# Altium PCB PCB3.PcbDoc
Units mm, origin at the board's own origin, x right, y up, seen from the top; angles counter-clockwise.
Board outline 35.94 x 35.31 mm, 2 copper layers (Top Layer, Bottom Layer); 16 components, 15 nets, 51 pads, 4 vias.
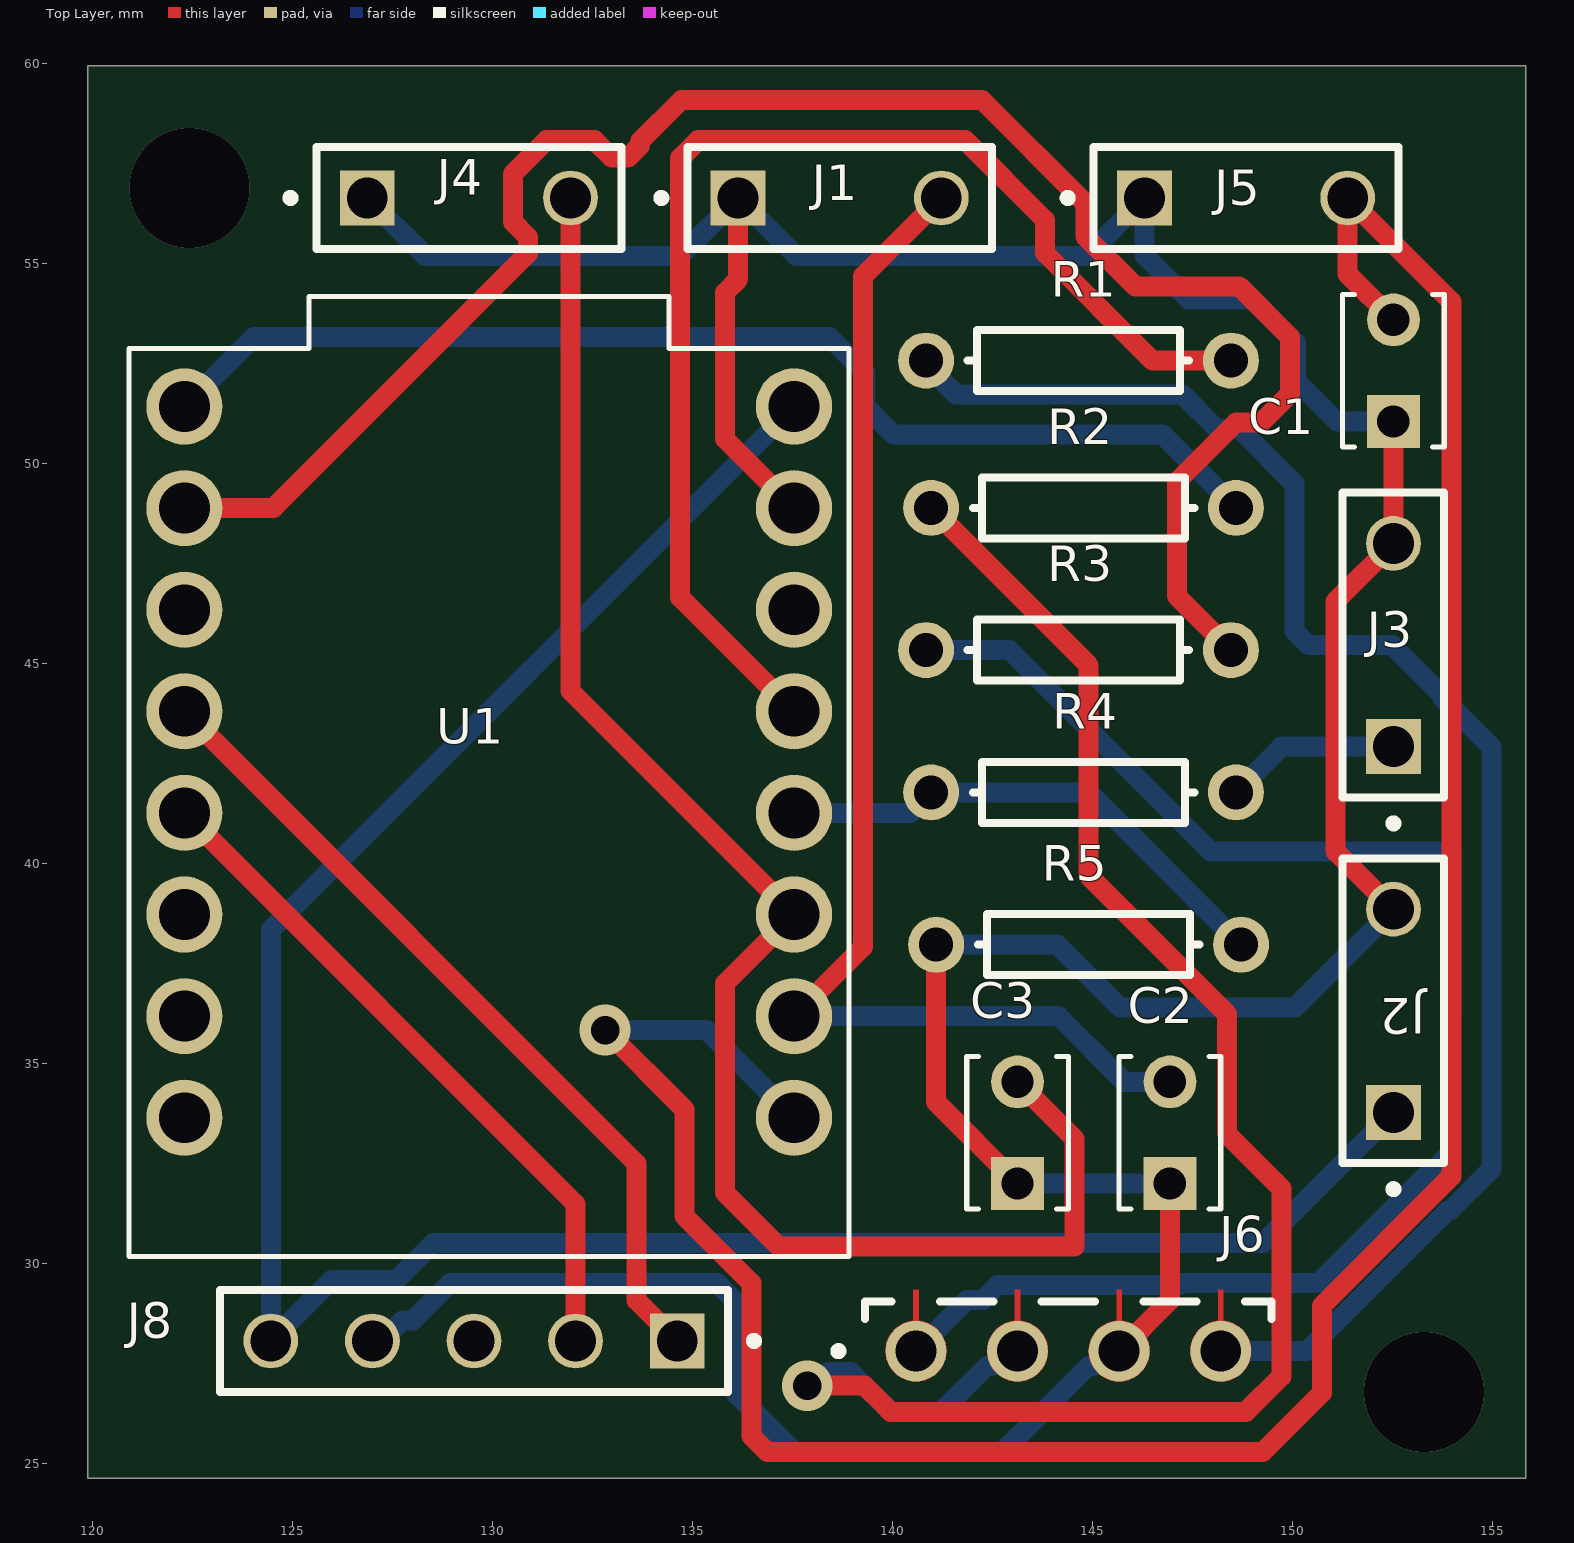
[diagram p0: Top Layer view]
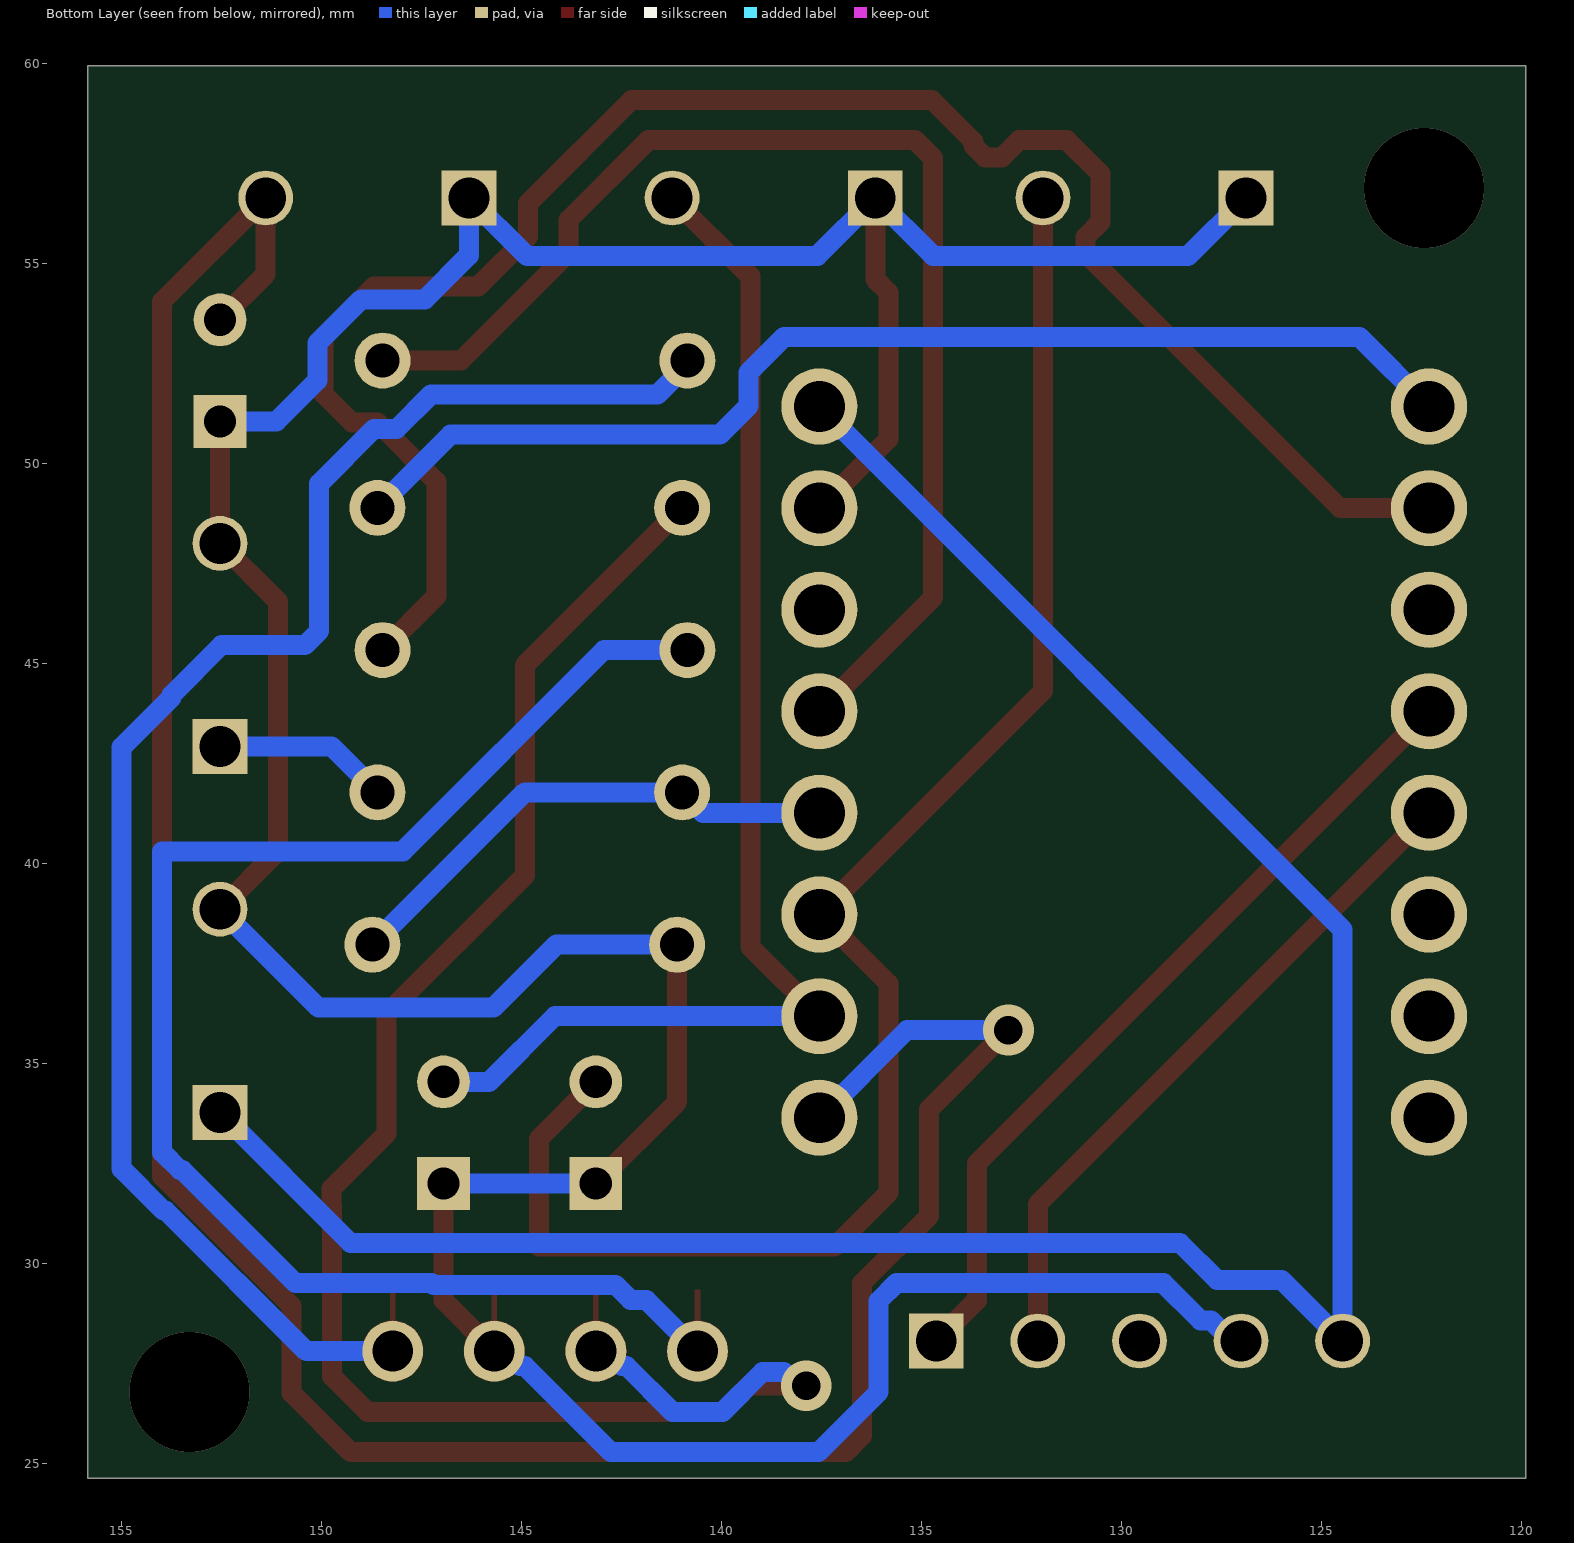
[diagram p1: Bottom Layer view, seen from below]

## Layer stack, top to bottom
Top Solder: solder mask 0.0102, Solder Resist, Dk 3.5
Top Layer: signal copper 0.0356
Dielectric 1: dielectric 0.32, FR-4, Dk 4.8
Bottom Layer: signal copper 0.0356
Bottom Solder: solder mask 0.0102, Solder Resist, Dk 3.5

## Board outline
119.888,24.638 155.829,24.638 155.829,59.944 119.888,59.944

## Design rules (kind name [scope] priority, off if disabled: settings)
Clearance [All] p1: gap=0.508 ignorepadtopadclearanceinfootprint=FALSE except(0.635: Arc-Hole Track-Hole SMDPad-Hole THPad-Hole Via-Hole Fill-Hole Poly-Hole Region-Hole Text-Hole)
PolygonConnect [All] p1: connectstyle=Relief reliefconductorwidth=0.254 reliefentries=4 polygonreliefangle="90 Angle" airgapwidth=0.254
RoutingVias [All] p1: holewidth=0.711 width=1.27 viastyle="Through Hole" minholewidth=0.711 minwidth=1.27 maxholewidth=0.711 maxwidth=1.27
SolderMaskExpansion [All] p1: expansion=0.102 istentingtop=FALSE
Width [All] p1: maxlimit=0.7 minlimit=0.3 preferedwidth=0.5
30 further rules are at their usual default settings.

## Components (designator, comment, footprint, x,y, rotation, side; value= is the part's Value field where it differs from the comment)
C1 "C315C470J1G5TA" CAPRR254W54L381T254H466 152.527,52.324 r90 top
C2 "C315C470J1G5TA" CAPRR254W54L381T254H466 146.939,33.274 r90 top
C3 "C315C470J1G5TA" CAPRR254W54L381T254H466 143.129,33.274 r90 top
J1 "S2" ? 136.144,56.642 r0 top
J2 "S4" ? 152.527,33.782 r90 top
J3 "S1" ? 152.527,42.926 r90 top
J4 "S3" ? 126.873,56.642 r0 top
J5 "S1" ? 146.304,56.642 r0 top
J6 "RGB" SAMTEC_MTLW-104-X-X-S-X 144.399,27.813 r180 top
J8 "RTC" SAMTEC_TSW-105-23-L-S 134.62,28.067 r180 top
R1 "Res1" AXIAL-0.3 144.653,52.578 r180 top value=1K
R2 "Res1" AXIAL-0.3 144.78,48.895 r180 top value=1K
R3 "Res1" AXIAL-0.3 144.653,45.339 r180 top value=1K
R4 "Res1" AXIAL-0.3 144.78,41.783 r180 top value=1K
R5 "Res1" AXIAL-0.3 144.907,37.973 r180 top value=1K
U1 "ESP32-C3_SUPERMINI" MODULE_ESP32-C3_SUPERMINI 129.921,41.529 r0 top

## Footprints (in the part's own frame and the unit in brackets; to place one, negate y for a bottom-side part, rotate by r counter-clockwise, add the part's x,y. Pads: shape width x height; smd on the part's side, far side on the other; paste and mask are expansions set on the pad)
AXIAL-0.3 [mm] "Axial Device, Thru-Hole; 2 Leads; 0.3 in Pin Spacing"
  round 1.4 hole 0.85: 1(-3.81,0) 2(3.81,0)
  silkscreen extent -2.77,-0.76 2.77,0.76
CAPRR254W54L381T254H466 [mm]
  rect 1.318x1.318 / inner round 1.318 / far side rect 1.318x1.318 hole 0.81: 1(-1.27,0)
  round 1.318 hole 0.81: 2(1.27,0)
  silkscreen extent -1.91,-1.27 1.91,1.27
MODULE_ESP32-C3_SUPERMINI [mm]
  round 1.905 hole 1.27: 0(7.62,-7.88) 1(7.62,-5.34) 2(7.62,-2.8) 3(7.62,-0.26) 3.3(7.62,4.82) 4(7.62,2.28) 5(-7.62,9.9) 5V(7.62,9.9) 6(-7.62,7.36) 7(-7.62,4.82) 8(-7.62,2.28) 9(-7.62,-0.26) 10(-7.62,-2.8) 20(-7.62,-5.34) 21(-7.62,-7.88) G(7.62,7.36)
  silkscreen extent -9,-11.35 9,12.65
SAMTEC_MTLW-104-X-X-S-X [mm]
  round 1.52 hole 1.02: 01(3.81,0) 02(1.27,0) 03(-1.27,0) 04(-3.81,0)
  Top Layer region: -3.731,0.756 -3.652,0.743 -3.575,0.723 -3.501,0.694 -3.43,0.658 -3.363,0.615 -3.301,0.565 -3.245,0.509 -3.195,0.447 -3.152,0.38 -3.116,0.309 -3.087,0.235 -3.067,0.158 -3.054,0.079 -3.05,0 -3.051,-0.038 -3.054,-0.076 -3.058,-0.113 -3.065,-0.151 -3.073,-0.187 -3.083,-0.224 -3.095,-0.259 -3.109,-0.294 -3.124,-0.329 -3.141,-0.363 -3.16,-0.395 -3.18,-0.427 -3.202,-0.458 -3.225,-0.487 -3.25,-0.516 -3.276,-0.543 -3.304,-0.569 -3.333,-0.593 -3.362,-0.616 -3.393,-0.638 -3.425,-0.658 -3.458,-0.676 -3.492,-0.692 -3.527,-0.707 -3.562,-0.721 -3.598,-0.732 -3.634,-0.742 -3.671,-0.75 -3.708,-0.756 -3.745,-0.76 -3.745,-1.53 -3.875,-1.53 -3.875,-0.76 -3.912,-0.756 -3.949,-0.75 -3.986,-0.742 -4.022,-0.732 -4.058,-0.721 -4.093,-0.707 -4.128,-0.692 -4.162,-0.676 -4.195,-0.658 -4.227,-0.638 -4.258,-0.616 -4.287,-0.593 -4.316,-0.569 -4.344,-0.543 -4.37,-0.516 -4.395,-0.487 -4.418,-0.458 -4.44,-0.427 -4.46,-0.395 -4.479,-0.363 -4.496,-0.329 -4.511,-0.294 -4.525,-0.259 -4.537,-0.224 -4.547,-0.187 -4.555,-0.151 -4.562,-0.113 -4.566,-0.076 -4.569,-0.038 -4.57,0 -4.566,0.079 -4.553,0.158 -4.533,0.235 -4.504,0.309 -4.468,0.38 -4.425,0.447 -4.375,0.509 -4.319,0.565 -4.257,0.615 -4.19,0.658 -4.119,0.694 -4.045,0.723 -3.968,0.743 -3.889,0.756 -3.81,0.76
  Top Layer region: -1.191,0.756 -1.112,0.743 -1.035,0.723 -0.961,0.694 -0.89,0.658 -0.823,0.615 -0.761,0.565 -0.705,0.509 -0.655,0.447 -0.612,0.38 -0.576,0.309 -0.547,0.235 -0.527,0.158 -0.514,0.079 -0.51,0 -0.511,-0.038 -0.514,-0.076 -0.518,-0.113 -0.525,-0.151 -0.533,-0.187 -0.543,-0.224 -0.555,-0.259 -0.569,-0.294 -0.584,-0.329 -0.601,-0.363 -0.62,-0.395 -0.64,-0.427 -0.662,-0.458 -0.685,-0.487 -0.71,-0.516 -0.736,-0.543 -0.764,-0.569 -0.793,-0.593 -0.822,-0.616 -0.853,-0.638 -0.885,-0.658 -0.918,-0.676 -0.952,-0.692 -0.987,-0.707 -1.022,-0.721 -1.058,-0.732 -1.094,-0.742 -1.131,-0.75 -1.168,-0.756 -1.205,-0.76 -1.205,-1.53 -1.335,-1.53 -1.335,-0.76 -1.372,-0.756 -1.409,-0.75 -1.446,-0.742 -1.482,-0.732 -1.518,-0.721 -1.553,-0.707 -1.588,-0.692 -1.622,-0.676 -1.655,-0.658 -1.687,-0.638 -1.718,-0.616 -1.747,-0.593 -1.776,-0.569 -1.804,-0.543 -1.83,-0.516 -1.855,-0.487 -1.878,-0.458 -1.9,-0.427 -1.92,-0.395 -1.939,-0.363 -1.956,-0.329 -1.971,-0.294 -1.985,-0.259 -1.997,-0.224 -2.007,-0.187 -2.015,-0.151 -2.022,-0.113 -2.026,-0.076 -2.029,-0.038 -2.03,0 -2.026,0.079 -2.013,0.158 -1.993,0.235 -1.964,0.309 -1.928,0.38 -1.885,0.447 -1.835,0.509 -1.779,0.565 -1.717,0.615 -1.65,0.658 -1.579,0.694 -1.505,0.723 -1.428,0.743 -1.349,0.756 -1.27,0.76
  Top Layer region: 1.349,0.756 1.428,0.743 1.505,0.723 1.579,0.694 1.65,0.658 1.717,0.615 1.779,0.565 1.835,0.509 1.885,0.447 1.928,0.38 1.964,0.309 1.993,0.235 2.013,0.158 2.026,0.079 2.03,0 2.029,-0.038 2.026,-0.076 2.022,-0.113 2.015,-0.151 2.007,-0.187 1.997,-0.224 1.985,-0.259 1.971,-0.294 1.956,-0.329 1.939,-0.363 1.92,-0.395 1.9,-0.427 1.878,-0.458 1.855,-0.487 1.83,-0.516 1.804,-0.543 1.776,-0.569 1.747,-0.593 1.718,-0.616 1.687,-0.638 1.655,-0.658 1.622,-0.676 1.588,-0.692 1.553,-0.707 1.518,-0.721 1.482,-0.732 1.446,-0.742 1.409,-0.75 1.372,-0.756 1.335,-0.76 1.335,-1.53 1.205,-1.53 1.205,-0.76 1.168,-0.756 1.131,-0.75 1.094,-0.742 1.058,-0.732 1.022,-0.721 0.987,-0.707 0.952,-0.692 0.918,-0.676 0.885,-0.658 0.853,-0.638 0.822,-0.616 0.793,-0.593 0.764,-0.569 0.736,-0.543 0.71,-0.516 0.685,-0.487 0.662,-0.458 0.64,-0.427 0.62,-0.395 0.601,-0.363 0.584,-0.329 0.569,-0.294 0.555,-0.259 0.543,-0.224 0.533,-0.187 0.525,-0.151 0.518,-0.113 0.514,-0.076 0.511,-0.038 0.51,0 0.514,0.079 0.527,0.158 0.547,0.235 0.576,0.309 0.612,0.38 0.655,0.447 0.705,0.509 0.761,0.565 0.823,0.615 0.89,0.658 0.961,0.694 1.035,0.723 1.112,0.743 1.191,0.756 1.27,0.76
  Top Layer region: 3.889,0.756 3.968,0.743 4.045,0.723 4.119,0.694 4.19,0.658 4.257,0.615 4.319,0.565 4.375,0.509 4.425,0.447 4.468,0.38 4.504,0.309 4.533,0.235 4.553,0.158 4.566,0.079 4.57,0 4.569,-0.038 4.566,-0.076 4.562,-0.113 4.555,-0.151 4.547,-0.187 4.537,-0.224 4.525,-0.259 4.511,-0.294 4.496,-0.329 4.479,-0.363 4.46,-0.395 4.44,-0.427 4.418,-0.458 4.395,-0.487 4.37,-0.516 4.344,-0.543 4.316,-0.569 4.287,-0.593 4.258,-0.616 4.227,-0.638 4.195,-0.658 4.162,-0.676 4.128,-0.692 4.093,-0.707 4.058,-0.721 4.022,-0.732 3.986,-0.742 3.949,-0.75 3.912,-0.756 3.875,-0.76 3.875,-1.53 3.745,-1.53 3.745,-0.76 3.708,-0.756 3.671,-0.75 3.634,-0.742 3.598,-0.732 3.562,-0.721 3.527,-0.707 3.492,-0.692 3.458,-0.676 3.425,-0.658 3.393,-0.638 3.362,-0.616 3.333,-0.593 3.304,-0.569 3.276,-0.543 3.25,-0.516 3.225,-0.487 3.202,-0.458 3.18,-0.427 3.16,-0.395 3.141,-0.363 3.124,-0.329 3.109,-0.294 3.095,-0.259 3.083,-0.224 3.073,-0.187 3.065,-0.151 3.058,-0.113 3.054,-0.076 3.051,-0.038 3.05,0 3.054,0.079 3.067,0.158 3.087,0.235 3.116,0.309 3.152,0.38 3.195,0.447 3.245,0.509 3.301,0.565 3.363,0.615 3.43,0.658 3.501,0.694 3.575,0.723 3.652,0.743 3.731,0.756 3.81,0.76
  silkscreen extent -5.08,-1.25 5.85,0.1
SAMTEC_TSW-105-23-L-S [mm]
  rect 1.37x1.37 hole 1.02: 01(0,0)
  round 1.37 hole 1.02: 02(2.54,0) 03(5.08,0) 04(7.62,0) 05(10.16,0)
  silkscreen extent -2.02,-1.27 11.43,1.27
? [mm]
  rect 1.37x1.37 hole 1.02: 01(0,0)
  round 1.37 hole 1.02: 02(5.08,0)
  silkscreen extent -2.02,-1.27 6.35,1.27

## Part data
C1 C2 C3: "Capacitor: ceramic; MLCC, monolithic; 47pF; 100V; C0G; Â±5%; THT", Package="Radial Kemet", Check_prices=https://www.snapeda.com/parts/C315C470J1G5TA/KEMET/view-part/?ref=eda, MF=KEMET, MP=C315C470J1G5TA, SnapEDA_Link=https://www.snapeda.com/parts/C315C470J1G5TA/KEMET/view-part/?ref=snap
J1 J2 J3 J4 J5: library part TSW-202-07-T-S, Package=None, Availability=Unavailable, MP=TSW-202-07-T-S, Price=None
J6: library part MTLW-104-X-X-S-X, Package=None, Availability=Unavailable, MF="{'manufacturer': u'Samtec Inc.'}", MP=MTLW-104-X-X-S-X, Price=None
J8: library part TSW-105-23-L-S, "Connector Header Through Hole 5 position 0.100 (2.54mm)", Package=None, Check_prices=https://www.snapeda.com/parts/TSW-105-23-L-S/Samtec/view-part/?ref=eda, Digi-Key_Part_Number=SAM1071-05-ND, MF=Samtec, MP=TSW-105-23-L-S, Purchase-URL=https://pricing.snapeda.com/search/part/TSW-105-23-L-S/?ref=eda, SnapEDA_Link=https://www.snapeda.com/parts/TSW-105-23-L-S/Samtec/view-part/?ref=snap
R1 R2 R3 R4 R5: "Resistor", LatestRevisionDate=17-Jul-2002, LatestRevisionNote="Re-released for DXP Platform.", PackageDescription="Axial Device, Thru-Hole; 2 Leads; 0.3 in Pin Spacing", PackageReference=AXIAL-0.3, Published=8-Jun-2000, Publisher="Altium Limited"
U1: "Super tiny ESP32-C3 board", Package=Package, Check_prices=https://www.snapeda.com/parts/ESP32-C3%20SuperMini/Espressif+Systems/view-part/?ref=eda, MF="Espressif Systems", MP="ESP32-C3 SuperMini", SnapEDA_Link=https://www.snapeda.com/parts/ESP32-C3%20SuperMini/Espressif+Systems/view-part/?ref=snap

## Via types
v1: diameter 3, hole 3, Top Layer to Bottom Layer, 2 vias
v2: diameter 1.27, hole 0.711, Top Layer to Bottom Layer, 2 vias

## Nets (pads, with @x,y where several pads share a name; then routed paths per layer and width w, separated by ;. In a path a pad name is that pad's centre, name@x,y a point inside that pad or via, vN(x,y) a via of type N, cw(c..) or ccw(c..) an arc to the next point about the centre after c; other vN are vias at no path point)
BAT+: J3.01 R4.1 | length 4.4
  Bottom Layer w0.5: R4.1 149.733,42.926 J3.01
GND: C1.1 C2.1 C3.1 J1.01 J2.02 J3.02 J4.01 J5.01 J6.03 J8.04 R5.2 U1.G | length 105.6
  Top Layer w0.5: J1.01 136.144,54.61 135.814,54.28 135.814,50.616 U1.G ; R5.2 141.097,34.036 C3.1 ; J6.03 146.939,29.083 C2.1 ; J2.02 151.079,40.31 151.079,46.558 J3.02 C1.1
  Bottom Layer w0.5: J4.01 128.321,55.194 134.696,55.194 J1.01 137.592,55.194 144.856,55.194 J5.01 146.304,55.207 147.402,54.109 148.994,54.109 150.092,53.01 150.092,52.08 151.118,51.054 C1.1 ; J8.04 127.235,28.067 127.751,28.583 128.015,28.583 128.942,29.51 135.619,29.51 136.063,29.066 136.063,26.788 137.564,25.287 142.75,25.287 144.905,27.442 145.022,27.442 145.393,27.813 J6.03 ; R5.2 144.12,37.973 145.694,36.398 150.063,36.398 J2.02 ; C3.1 C2.1
NetC1_2: C1.2 J5.02 U1.0 | length 68.1
  Top Layer w0.5: v2(132.817,35.839) 134.798,33.858 134.798,31.191 136.474,29.515 136.474,25.693 136.88,25.287 147.379,25.287 147.468,25.287 cw(c147.469,24.787) 147.478,25.287 149.255,25.287 150.735,26.767 150.735,28.942 153.975,32.182 153.975,54.051 J5.02 151.384,54.737 C1.2
  Bottom Layer w0.5: v2(132.817,35.839) 135.351,35.839 U1.0
NetC2_2: C2.2 J1.02 U1.1 | length 32.1
  Top Layer w0.5: U1.1 139.268,37.916 139.268,54.686 J1.02
  Bottom Layer w0.5: U1.1 144.151,36.189 145.796,34.544 C2.2
NetC3_2: C3.2 J4.02 U1.2 | length 41.9
  Top Layer w0.5: J4.02 131.953,44.317 U1.2 135.814,37.002 135.814,31.775 137.16,30.429 144.551,30.429 144.551,33.122 C3.2
NetJ6_01: J6.01 R3.2 | length 38.2
  Bottom Layer w0.5: J6.01 141.867,29.091 142.26,29.091 142.633,29.464 147.193,29.464 147.239,29.51 150.639,29.51 153.468,32.339 153.526,32.339 153.97,32.783 153.97,36.241 153.975,36.246 153.975,40.31 147.955,40.31 142.926,45.339 R3.2
NetJ6_02: J6.02 R2.2 | length 44.3
  Top Layer w0.5: v2(137.871,26.949) 139.306,26.949 139.814,26.441 139.96,26.295 146.298,26.295 147.051,26.295 147.895,26.295 148.838,26.295 149.727,27.184 149.727,31.457 149.733,31.463 149.733,31.877 149.587,32.023 148.361,33.249 148.361,36.246 144.907,39.7 144.907,44.958 R2.2
  Bottom Layer w0.5: v2(137.871,26.949) 138.08,26.949 138.422,27.292 138.963,27.292 139.96,26.295 141.218,26.295 142.365,27.442 142.482,27.442 142.853,27.813 J6.02
NetJ6_04: J6.04 R1.2 | length 39.6
  Bottom Layer w0.5: R1.2 140.843,52.475 141.586,51.732 147.247,51.732 148.113,50.866 148.681,50.866 150.048,49.499 150.048,45.816 150.398,45.466 152.488,45.466 153.735,44.219 153.735,44.16 154.983,42.912 154.983,32.37 153.943,31.331 153.886,31.331 150.368,27.813 J6.04
NetJ8_01: J8.01 U1.8 | length 20.8
  Top Layer w0.5: U1.8 133.604,32.506 133.604,29.083 J8.01
NetJ8_02: J8.02 U1.9 | length 17.3
  Top Layer w0.5: U1.9 132.08,31.49 J8.02
NetR1_1: R1.1 U1.4 | length 31.7
  Top Layer w0.5: U1.4 134.696,46.654 134.696,57.636 135.145,58.085 141.822,58.085 143.815,56.092 143.815,55.264 146.501,52.578 R1.1
NetR2_1: R2.1 U1.5 | length 29.3
  Bottom Layer w0.5: U1.5 124.034,53.162 138.43,53.162 139.319,52.273 139.319,51.435 140.03,50.724 146.761,50.724 R2.1
NetR3_1: R3.1 U1.6 | length 46.8
  Top Layer w0.5: U1.6 124.524,48.889 130.887,55.253 130.887,55.667 130.51,56.044 130.51,57.24 131.355,58.085 132.551,58.085 132.981,57.655 133.395,57.655 133.688,57.948 133.688,58.054 134.728,59.093 142.239,59.093 144.823,56.509 144.823,55.681 146.072,54.432 148.671,54.432 149.936,53.167 149.936,51.74 149.225,51.029 148.59,51.029 147.117,49.555 147.117,46.685 R3.1
NetR4_2: R4.2 R5.1 U1.3 | length 13
  Bottom Layer w0.5: U1.3 140.456,41.269 R4.2 144.907,41.783 R5.1
VCC: J2.01 J8.05 U1.5V | length 59.2
  Bottom Layer w0.5: U1.5V 124.46,38.348 J8.05 125.984,29.591 127.598,29.591 128.525,30.518 149.263,30.518 J2.01
pads on no net: J8.03 U1.3.3 U1.7 U1.10 U1.20 U1.21
copper on no net:
  other v1: 153.289,26.797 122.428,56.896